# Altium PCB PCB1.PcbDoc
Units mm, origin at the board's own origin, x right, y up, seen from the top; angles counter-clockwise.
Board outline 44.5 x 49.5 mm, 2 copper layers (Top Layer, Bottom Layer); 21 components, 0 nets, 109 pads, 14 vias.
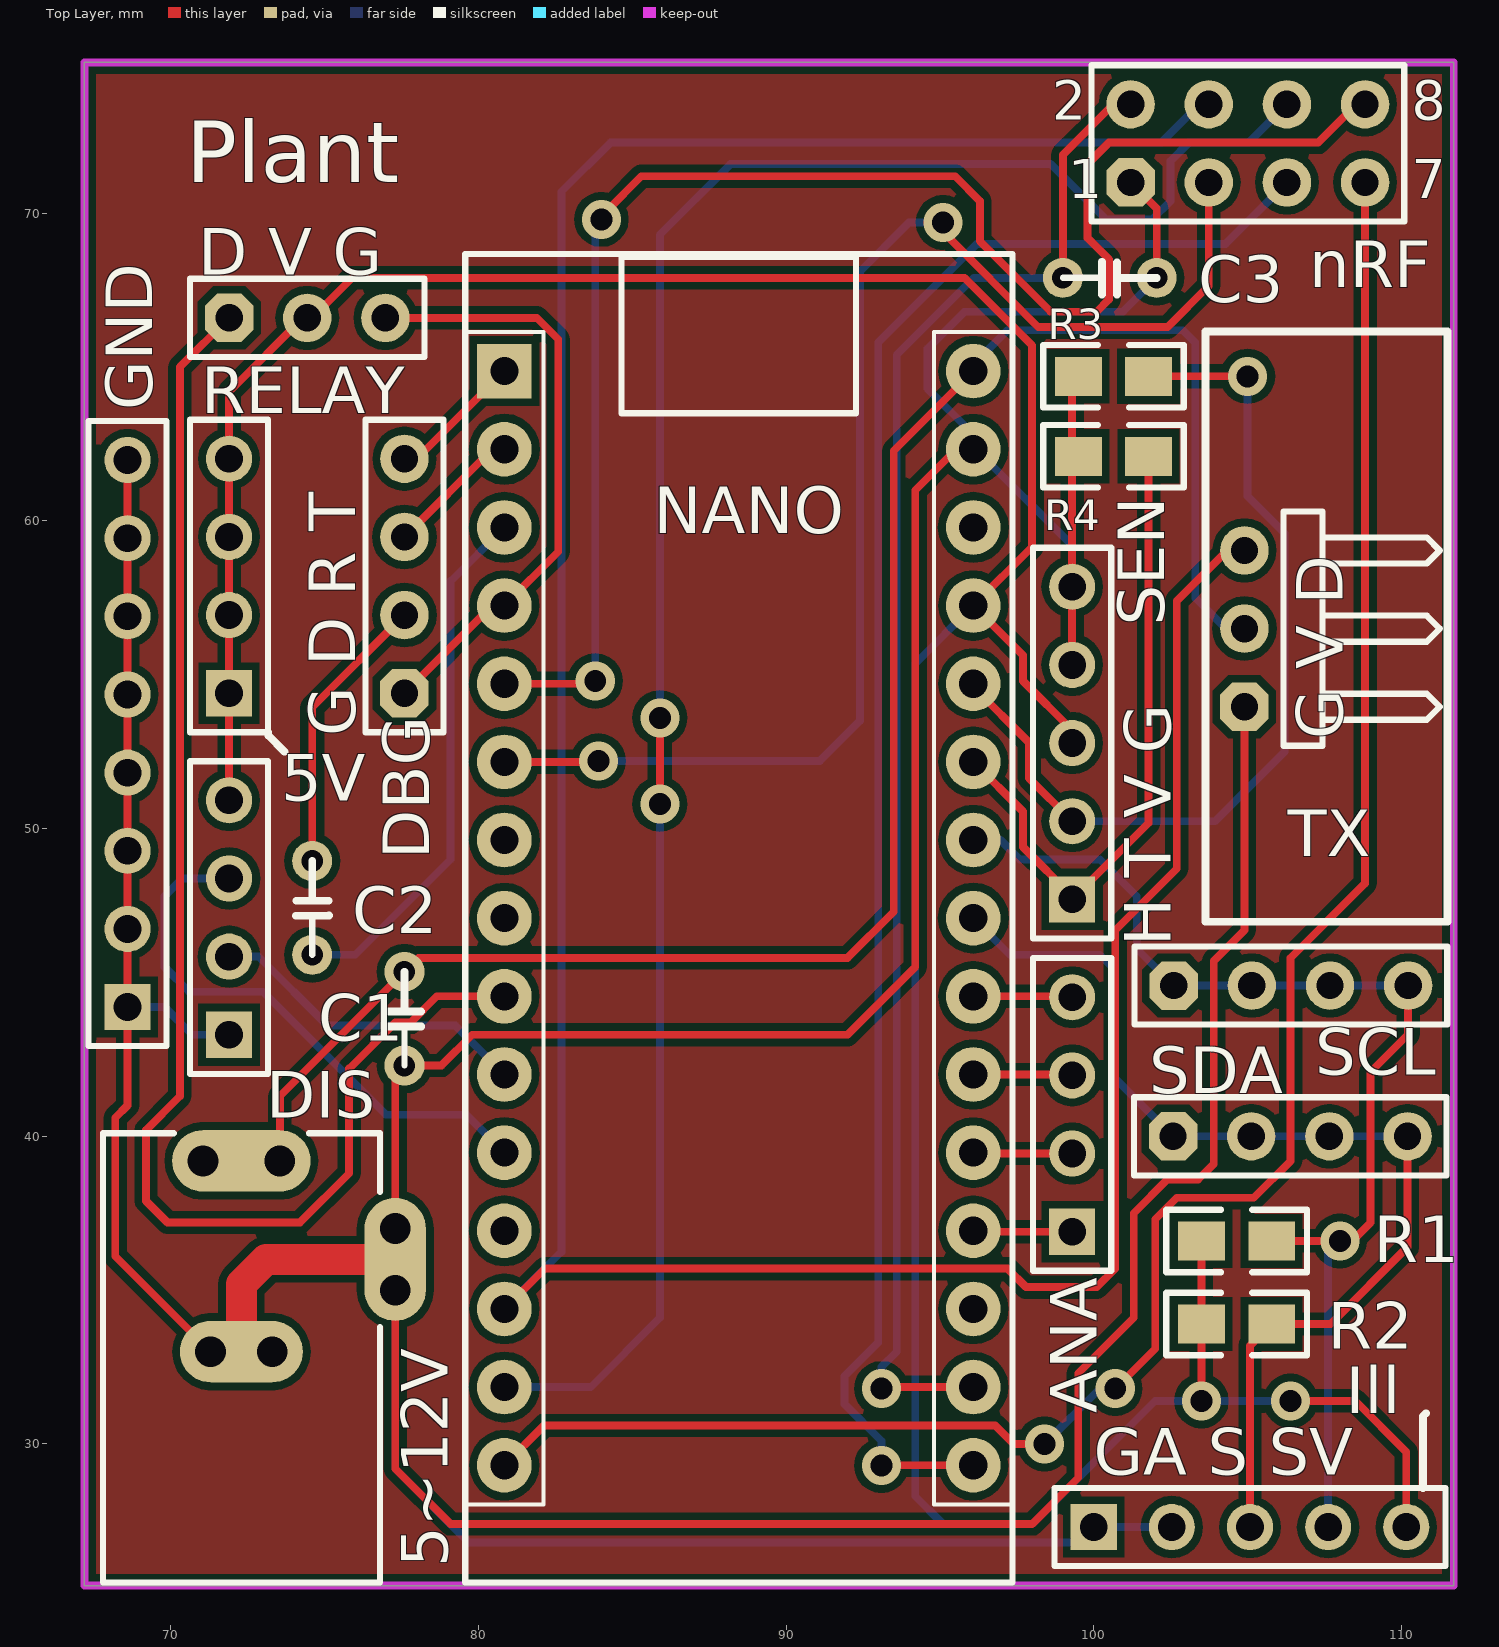
[diagram p0: Top Layer view]
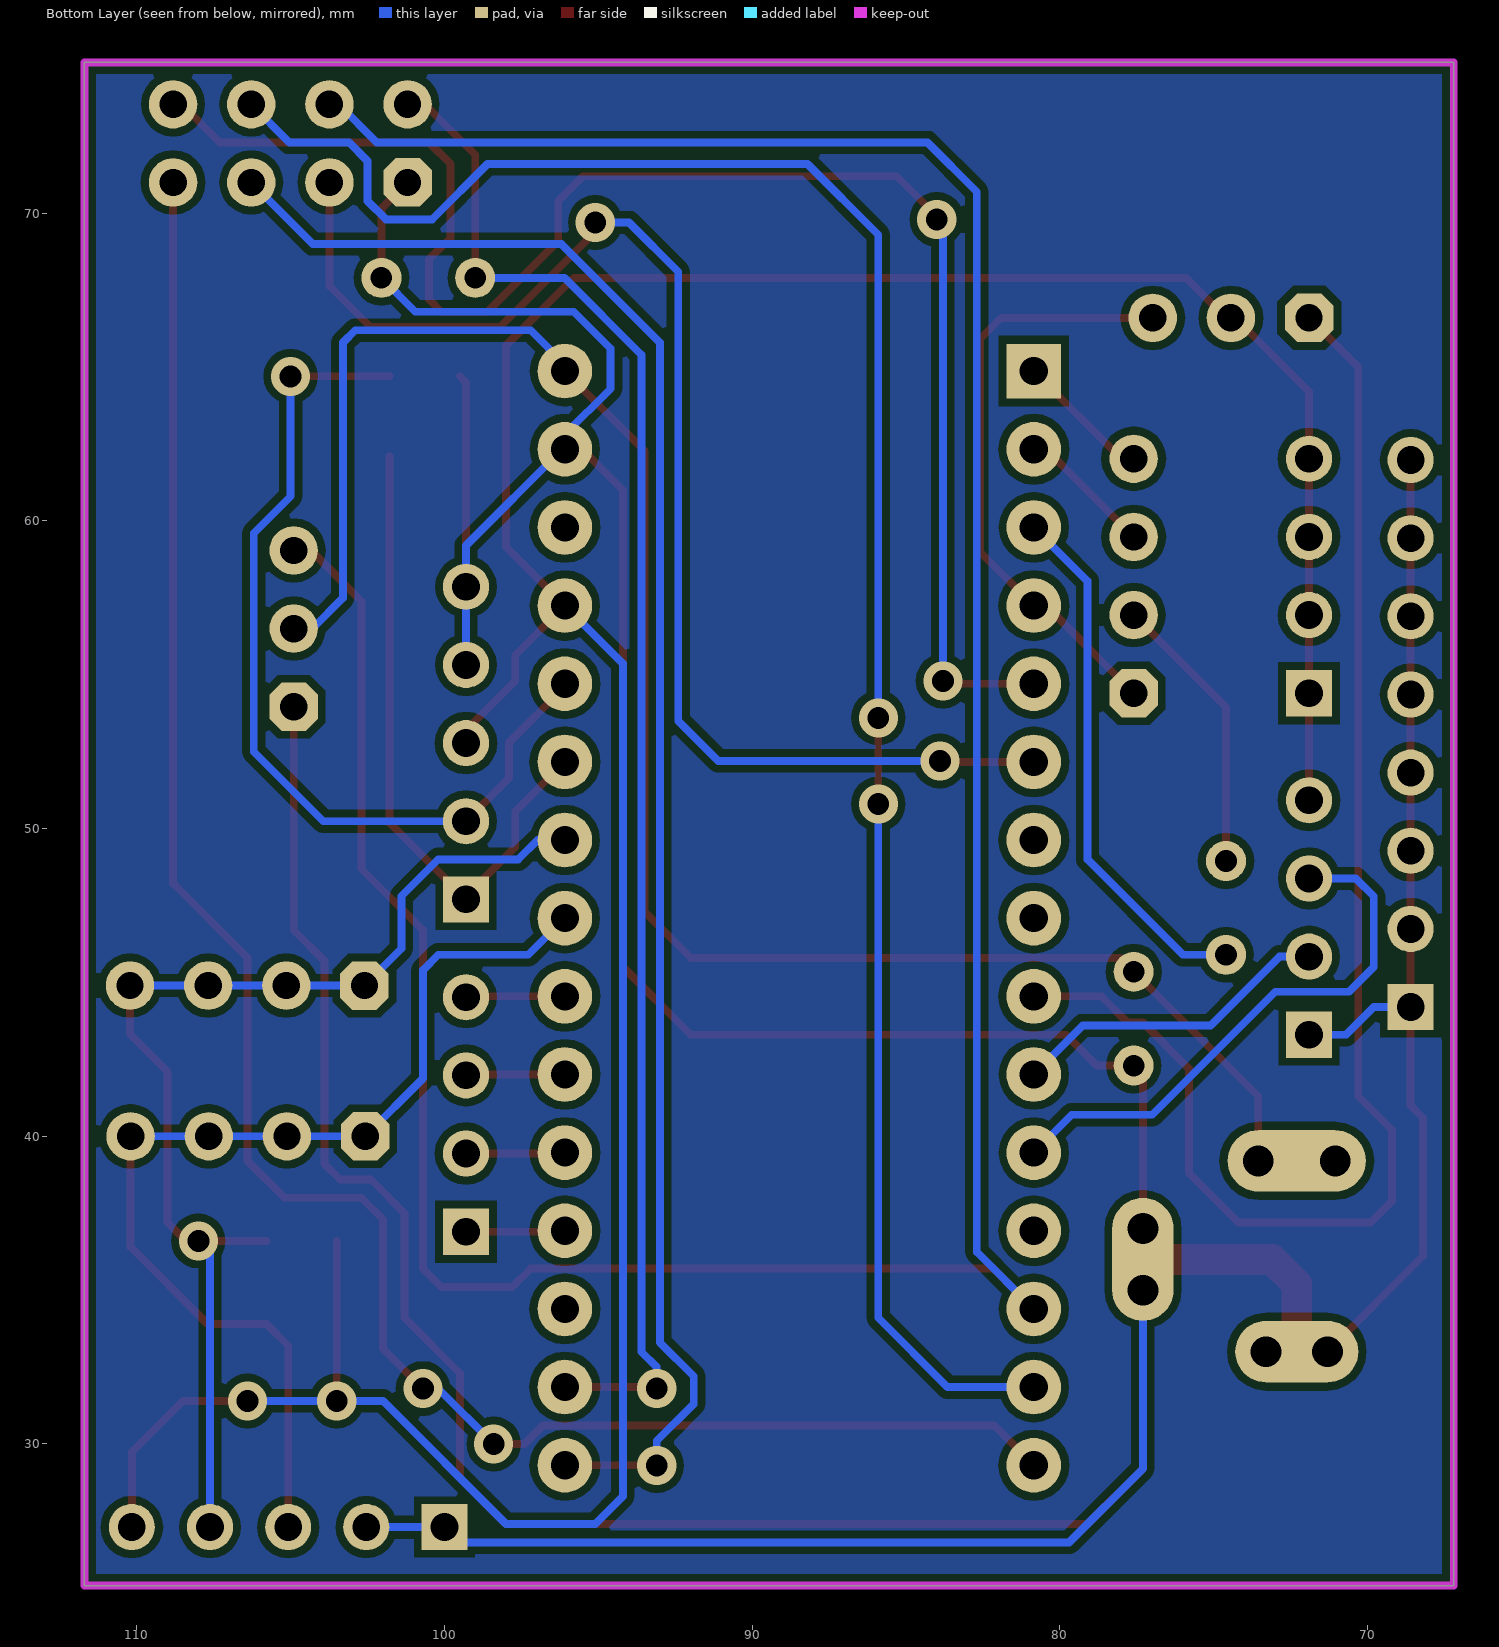
[diagram p1: Bottom Layer view, seen from below]

## Layer stack, top to bottom
Top Solder: solder mask 0.0102, Solder Resist, Dk 3.5
Top Layer: signal copper 0.0356
Dielectric1: dielectric 0.32, FR-4, Dk 4.8
Bottom Layer: signal copper 0.0356
Bottom Solder: solder mask 0.0102, Solder Resist, Dk 3.5

## Board outline
67.2,25.4 111.7,25.4 111.7,74.9 67.2,74.9

## Design rules (kind name [scope] priority, off if disabled: settings)
Clearance [All] p1: gap=0.254
FabricationTestPointUsage TestPointUsage [All] p1: valid=0 allowmultiple=FALSE
FabricationTestpoint Testpoint [All] p1: side=3 testpointundercomponent=TRUE minsize=1.016 maxsize=2.54 preferedsize=1.524 minholesize=0 maxholesize=1.016 preferedholesize=0.813 testpointgrid=0.025 allowsidetop=TRUE allowsidebottom=TRUE usegrid=TRUE gridtolerance=0
PolygonConnect [All] p1: connectstyle=Relief reliefconductorwidth=0.254 reliefentries=4 polygonreliefangle="90 Angle" airgapwidth=0.254
RoutingVias [All] p1: holewidth=0.711 width=1.27 viastyle="Through Hole" minholewidth=0.711 minwidth=1.27 maxholewidth=0.711 maxwidth=1.27
SolderMaskExpansion [All] p1: expansion=0.102
Width [All] p1: maxlimit=0.254 minlimit=0.254 preferedwidth=0.254
28 further rules are at their usual default settings.

## Components (designator, comment, footprint, x,y, rotation, side; value= is the part's Value field where it differs from the comment)
5V "JP" HDR1X4#1 71.9,54.4 r90 top
5~12V "DC Power Jack" KLD-0202 72.3,25.5 r90 top
ANA "JP" HDR1X4#1 99.3,36.9 r90 top
C1 "104P" CB1 77.6,42.3 r90 top
C2 "104P" CB1 74.6,45.9 r90 top
C3 "104P" CB1 99,67.9 r0 top
DBG "JP" HDR1X4#2 77.6,54.4 r90 top
DIS "JP" HDR1X4#3 71.9,43.3 r90 top
GND "JP" HDR1X8 68.6,44.2 r90 top
Ill "JP" HDR1X5#1 100,27.3 r0 top
NANO "Arduino Nano" NANO 79.5,68.6 r0 top
nRF "JP" HDR2X4 101.2,71 r0 top
R1 "4k7" 0805 103.5,36.6 r0 top
R2 "4k7" 0805 103.5,33.9 r0 top
R3 "100k" 0805 99.5,64.7 r0 top
R4 "100k" 0805 99.5,62.1 r0 top
RELAY "JP" HDR1X3 71.9,66.6 r0 top
SCL "JP" HDR1X4#4 102.6,44.9 r0 top
SDA "JP" HDR1X4#4 102.58,40 r0 top
SEN "JP" HDR1X5#2 99.3,47.7 r90 top
TX "TX" PCBComponent_1 104.9,56.5 r0 top

## Footprints (in the part's own frame and the unit in brackets; to place one, negate y for a bottom-side part, rotate by r counter-clockwise, add the part's x,y. Pads: shape width x height; smd on the part's side, far side on the other; paste and mask are expansions set on the pad)
0805 [mil]
  rect 60x50 smd: 1(0,0) 2(90,0)
  silkscreen extent -45,-40 135,40
CB1 [mm] "104P"
  round 1.3 hole 0.7: 1(0,0) 2(3.048,0)
  silkscreen extent 0,-0.55 3.05,0.52
HDR1X3 [mil]
  oct 62x62 hole 35: DATA(0,0)
  round 62 hole 35: GND(200,0) VCC(100,0)
  silkscreen extent -50,-50 250,50
HDR1X4#1 [mm] "Connector; Header; 4 Position"
  rect 1.5x1.5 hole 0.9: 1(0,0)
  round 1.5 hole 0.9: 2(2.54,0) 3(5.08,0) 4(7.62,0)
  silkscreen extent -1.27,-1.27 8.89,1.27
HDR1X4#2 [mm]
  round 1.575 hole 0.889: DTR(2.54,0) RX(5.08,0) TX(7.62,0)
  oct 1.575x1.575 hole 0.889: GND(0,0)
  silkscreen extent -1.27,-1.27 8.89,1.27
HDR1X4#3 [mm] "Connector; Header; 4 Position"
  round 1.5 hole 0.9: ECHO(2.54,0) TRIG(5.08,0) VCC(7.62,0)
  rect 1.5x1.5 hole 0.9: GND(0,0)
  silkscreen extent -1.27,-1.27 8.89,1.27
HDR1X4#4 [mm]
  oct 1.575x1.575 hole 0.889: 1(0,0)
  round 1.575 hole 0.889: 2(2.54,0) 3(5.08,0) 4(7.62,0)
  silkscreen extent -1.27,-1.27 8.89,1.27
HDR1X5#1 [mm] "Connector; Header; 5 Position"
  rect 1.5x1.5 hole 0.9: 1(0,0)
  round 1.5 hole 0.9: 2(2.54,0) 5(10.16,0) SCL(7.62,0) SDA(5.08,0)
  silkscreen extent -1.27,-1.27 11.43,1.27
HDR1X5#2 [mm] "Connector; Header; 5 Position"
  round 1.5 hole 0.9: GND(7.62,0) GND(10.16,0) Temperature(2.54,0) VCC(5.08,0)
  rect 1.5x1.5 hole 0.9: Humidity(0,0)
  silkscreen extent -1.27,-1.27 11.43,1.27
HDR1X8 [mm] "Connector; Header; 8 Position"
  rect 1.5x1.5 hole 0.9: 1(0,0)
  round 1.5 hole 0.9: 2(2.54,0) 3(5.08,0) 4(7.62,0) 5(10.16,0) 6(12.7,0) 7(15.24,0) 8(17.78,0)
  silkscreen extent -1.27,-1.27 19.05,1.27
HDR2X4 [mil]
  round 62 hole 35: CE(100,0) CSN(100,100) IRQ(300,100) MISO(300,0) MOSI(200,100) SCK(200,0) VCC(0,100)
  oct 62x62 hole 35: GND(0,0)
  silkscreen extent -50,-50 350,150
KLD-0202 [mm] "DC Power Jack, 2.5mm, KLD Series, PCB Mount"
  oval 2x4.5 all layers, no hole: 1(13.7,0)
  round 1.5 hole 1: 1A(13.7,-1.25) 1B(13.7,1.25) 2A(7.5,-1) 2B(7.5,1) 3A(9.5,-5) 3B(11.5,-5)
  oval 2x4 all layers, no hole: 2(7.5,0)
  oval 4x2 all layers, no hole: 3(10.5,-5)
  silkscreen extent 0,-4.5 14.6,4.5
NANO [mil]
  round 70 hole 36: 3V3(653,-1446.88) +5V(653,-446.88) A0(653,-1246.88) A1(653,-1146.88) A2(653,-1046.88) A3(653,-946.88) A4/SDA(653,-846.88) A5/SCL(653,-746.88) A6(653,-646.88) A7(653,-546.88) AREF(653,-1346.88) COM(53,-446.88) COM(653,-246.88) D0/RX(53,-246.88) D2(53,-546.88) D3(53,-646.88) D4(53,-746.88) D5(53,-846.88) D6(53,-946.88) D7(53,-1046.88) D8(53,-1146.88) D9(53,-1246.88) D10(53,-1346.88) D11/MOSI(53,-1446.88) D12/MISO(53,-1546.88) D13/SCK(653,-1546.88) RST(53,-346.88) RST(653,-346.88) VIN(653,-146.88)
  rect 70x70 hole 36: D1/TX(53,-146.88)
  silkscreen extent 3,-1697 703,3
PCBComponent_1 [mil]
  round 62 hole 35: DATA(0,100) VCC(0,0)
  oct 62x62 hole 35: GND(0,-100)
  silkscreen extent -50,-375 260,380

## Part data
GND: library part CON8

## Via types
v1: diameter 1.27, hole 0.711, Top Layer to Bottom Layer, 14 vias

## Nets (pads, with @x,y where several pads share a name; then routed paths per layer and width w, separated by ;. In a path a pad name is that pad's centre, name@x,y a point inside that pad or via, vN(x,y) a via of type N, cw(c..) or ccw(c..) an arc to the next point about the centre after c; other vN are vias at no path point)
pads on no net: 5V.1 5V.2 5V.3 5V.4 5~12V.1 5~12V.1A 5~12V.1B 5~12V.2 5~12V.2A 5~12V.2B 5~12V.3 5~12V.3A 5~12V.3B ANA.1 ANA.2 ANA.3 ANA.4 C1.1 C1.2 C2.1 C2.2 C3.1 C3.2 DBG.DTR DBG.GND DBG.RX DBG.TX DIS.ECHO DIS.GND DIS.TRIG DIS.VCC GND.1 GND.2 GND.3 GND.4 GND.5 GND.6 GND.7 GND.8 Ill.1 Ill.2 Ill.5 Ill.SCL Ill.SDA NANO.3V3 NANO.+5V NANO.A0 NANO.A1 NANO.A2 NANO.A3 NANO.A4/SDA NANO.A5/SCL NANO.A6 NANO.A7 NANO.AREF NANO.COM NANO.D0/RX NANO.D1/TX NANO.D2 NANO.D3 NANO.D4 NANO.D5 NANO.D6 NANO.D7 NANO.D8 NANO.D9 NANO.D10 NANO.D11/MOSI NANO.D12/MISO NANO.D13/SCK NANO.RST NANO.VIN nRF.CE nRF.CSN nRF.GND nRF.IRQ nRF.MISO nRF.MOSI nRF.SCK nRF.VCC R1.1 R1.2 R2.1 R2.2 R3.1 R3.2 R4.1 R4.2 RELAY.DATA RELAY.GND RELAY.VCC SCL.1 SCL.2 SCL.3 SCL.4 SDA.1 SDA.2 SDA.3 SDA.4 SEN.GND SEN.Humidity SEN.Temperature SEN.VCC TX.DATA TX.GND TX.VCC
copper on no net: | length 1089.4
  Top Layer w0.254: 68.6,61.98 68.6,44.2 68.6,41 68.2,40.6 68.2,36.1 71.3,33 ; 71.05,39.2 71.3,39.2 ; 71.9,50.92 71.9,54.4 71.9,61.98 71.9,64.2 74.3,66.6 74.44,66.6 74.6,66.6 75.9,67.9 93.055,67.9 95.8,67.9 98,65.7 98,59.163 96.086,57.249 97.7,55.635 97.7,54.8 99.3,53.2 99.3,52.78 ; 71.9,66.6 70.3,65 70.3,41.3 69.2,40.2 69.2,37.9 69.9,37.2 70.3,37.2 74.2,37.2 75.8,38.8 75.8,42.2 77.3,43.7 77.8,43.7 78.649,44.549 80.846,44.549 ; 73.55,39.2 73.55,41.298 78.052,45.8 92,45.8 93.5,47.3 93.5,62.283 96.086,64.869 ; 74.6,48.948 74.6,53.94 77.6,56.94 ; 76.98,66.6 81.9,66.6 82.6,65.9 82.6,59.003 80.846,57.249 ; 77.3,35 77.3,29.2 79.1,27.4 96.9,27.4 98,27.4 99.5,28.9 99.5,32.3 101.3,34.1 101.3,37.5 102.4,38.6 103.4,38.6 103.9,39.1 103.9,45.7 104.9,46.7 104.9,53.96 ; 77.3,37 77.3,42 77.6,42.3 78.8,42.3 79.8,43.3 92,43.3 94.2,45.5 94.2,61 95.529,62.329 96.086,62.329 ; 77.6,54.4 80.449,57.249 ; 77.6,59.48 80.449,62.329 ; 77.997,62.02 80.846,64.869 ; 80.846,29.309 82.137,30.6 96.8,30.6 97.4,30 v1(98.4,30) ; 80.846,34.389 82.157,35.7 97.2,35.7 97.8,35.1 100.1,35.1 100.7,35.7 100.7,36.8 100.7,46.7 102.7,48.7 102.7,57 102.7,57.4 104.34,59.04 104.9,59.04 ; 80.846,52.169 83.869,52.169 v1(83.9,52.2) ; 80.846,54.709 83.709,54.709 v1(83.8,54.8) ; v1@83.8,70.1 84.2,70.1 85.3,71.2 95.5,71.2 96.3,70.4 96.3,70.2 96.3,69.1 98.6,66.8 100.1,66.8 100.5,67.2 100.5,68.5 99.8,69.2 99.8,71.6 100.5,72.3 107.3,72.3 108.54,73.54 108.82,73.54 ; v1(85.9,50.8) v1(85.9,53.6) ; v1(93.1,29.3) 93.109,29.309 96.086,29.309 ; v1(93.1,31.8) 93.149,31.849 96.086,31.849 ; v1@94.6,69.7 v1@94.9,69.7 ; v1(95.1,69.7) 95.1,69.4 98.2,66.3 102.4,66.3 103.74,67.64 103.74,71 ; 96.086,39.469 96.115,39.44 99.3,39.44 ; 96.086,42.009 99.329,42.009 99.4,42.08 ; 96.086,44.549 99.329,44.549 99.4,44.62 ; 96.086,47.089 96.589,47.089 ; 96.086,52.086 96.086,52.169 97.7,50.555 97.7,49.4 99.3,47.8 99.3,47.7 101.786,50.186 101.786,62.1 ; 96.115,36.9 99.3,36.9 ; 96.491,54.709 96.086,54.709 96.086,54.614 97.9,52.8 97.9,51.64 99.3,50.24 ; 99,67.9 99,71.9 100.64,73.54 101.2,73.54 ; 99.3,55.32 99.3,64.5 99.5,64.7 ; v1(100.7,31.8) 102,33.1 102,37.3 102.7,38 105.2,38 106.4,39.2 106.4,45.8 108.82,48.22 108.82,71 108.5,71 ; 101.2,71 102.048,70.152 102.048,67.9 ; 101.786,64.7 v1(105,64.7) ; v1(103.5,31.4) 103.5,36.6 ; 105.08,27.3 105.08,33.194 105.786,33.9 107.7,33.9 110.2,36.4 110.2,40 ; 105.786,36.6 108.4,36.6 109,37.2 109,37.5 109,42.1 110.22,43.32 110.22,44.9 ; v1(106.4,31.4) 108.5,31.4 110.16,29.74 110.16,27.3
  Top Layer w1: 72.3,33 72.3,35.2 73.1,36 77.3,36
  Bottom Layer w0.254: 68.6,44.2 69.8,44.2 70.7,43.3 71.9,43.3 ; 71.9,45.84 72.86,45.84 75.1,43.6 79.255,43.6 80.846,42.009 ; 71.9,48.38 70.38,48.38 69.8,47.8 69.8,45.5 70.6,44.7 71.2,44.7 72.4,44.7 73,44.7 77,40.7 79.615,40.7 80.846,39.469 ; 74.6,45.9 76,45.9 79.1,49 79.1,58.043 80.846,59.789 ; 77.3,35 77.3,29.2 79.7,26.8 99.5,26.8 100,27.3 102.54,27.3 ; 77.6,62.02 77.997,62.02 ; 80.449,57.249 80.846,57.249 ; 80.449,62.329 80.846,62.329 ; 80.846,31.849 83.649,31.849 85.9,34.1 v1(85.9,50.8) ; 80.846,34.389 82.7,36.243 82.7,70.7 84.3,72.3 102.2,72.3 103.44,73.54 103.74,73.54 ; v1(83.8,54.8) 83.8,69.6 v1(84,69.8) ; v1(83.9,52.2) 91.1,52.2 92.4,53.5 92.4,68.1 94,69.7 v1(95.1,69.7) ; v1(85.9,53.6) 85.9,69.3 88.2,71.6 98.6,71.6 100.4,69.8 101.9,69.8 102.5,70.4 102.5,71.7 103.1,72.3 105.04,72.3 106.28,73.54 ; v1(93.1,29.3) 93.1,30.1 91.9,31.3 91.9,32.2 93,33.3 93,65.8 96.2,69 104.28,69 106.28,71 ; v1(93.1,31.8) 93.1,32.5 93.6,33 93.6,65.4 96.1,67.9 99,67.9 ; 96.086,47.089 97.275,45.9 100.2,45.9 100.7,45.4 100.7,41.88 102.58,40 110.2,40 ; 96.086,49.686 96.086,49.629 96.971,49.629 97.6,49 100.2,49 101.4,47.8 101.4,46.1 102.6,44.9 110.22,44.9 ; 96.086,57.249 94.2,55.363 94.2,28.3 95.1,27.4 98,27.4 102,31.4 v1(103.5,31.4) v1(106.4,31.4) ; 96.086,64.869 96.086,65.086 97.2,66.2 102.9,66.2 103.3,65.8 103.3,57.5 104.3,56.5 104.9,56.5 ; v1(98.4,30) 100.2,31.8 v1(100.7,31.8) ; 99.3,50.24 103.94,50.24 106.2,52.5 106.2,59.6 105,60.8 v1(105,64.7) ; 99.3,55.32 99.3,59.2 96.171,62.329 96.086,62.329 96.086,62.814 94.6,64.3 94.6,65.6 95.8,66.8 100.948,66.8 102.048,67.9 ; 107.62,27.3 107.62,36.22 v1(108,36.6)

## Polygon pours and split planes (outlines as drawn)
no net on Top Layer "Top Layer-No Net" (solid, pour order 5): 67.205,25.444 67.205,74.861 89.912,74.861 111.605,74.861 111.605,25.444
no net on Bottom Layer "Top Layer-No Net" (solid, pour order 9): 67.205,25.444 67.205,74.861 89.912,74.861 111.605,74.861 111.605,25.444

## Keep-outs
Keep-Out Layer:
  the board outline again, w0.254

## Silkscreen, mask and mechanical layers (free items; w line width, h text height)
Top Overlay:
  lines w0.254: 73.17,53.13 73.17,53.03 73.7,52.5 ; 110.7,28.57 110.7,30.9 110.8,31
  text "Plant" at 70.5,71 h2
  text "D V G" at 70.9,68 h1.52
  text "G D R T" at 76,53 h1.52 r90
  text "G V D" at 108.1,52.9 h1.52 r90
  text "H T V G" at 102.5,46.17 h1.52 r90
  text "GA S SV" at 100,29 h1.52

## Text inside footprints (layer, text, board x,y; h text height)
5~12V: Mechanical 1 "Alert PCB fab to slot details" at 66.234,25.786 h0.3 r90; Mechanical 1 "Assign keep-out area to slot" at 65.734,25.786 h0.3 r90; Mechanical 1 "Mech 1 - Slot cut-out" at 66.734,25.786 h0.3 r90; Mechanical 1 "Mech 2 - Clearance, move to internal plane if present" at 67.234,25.786 h0.3 r90
nRF: Top Overlay "2" at 98.66,73.032 h1.27; Top Overlay "1" at 99.168,70.492 h1.27; Top Overlay "7" at 110.344,70.492 h1.27; Top Overlay "8" at 110.344,73.032 h1.27